# Altium PCB 400503.PcbDoc (part 3 of 3)
Units mm, origin at the board's own origin, x right, y up, seen from the top; angles counter-clockwise.
Board outline 200 x 200 mm, 4 copper layers (Top Layer, Mid-Layer 1, Mid-Layer 2, Bottom Layer), stack 1.58 mm thick; 173 components, 73 nets, 535 pads, 1026 vias.
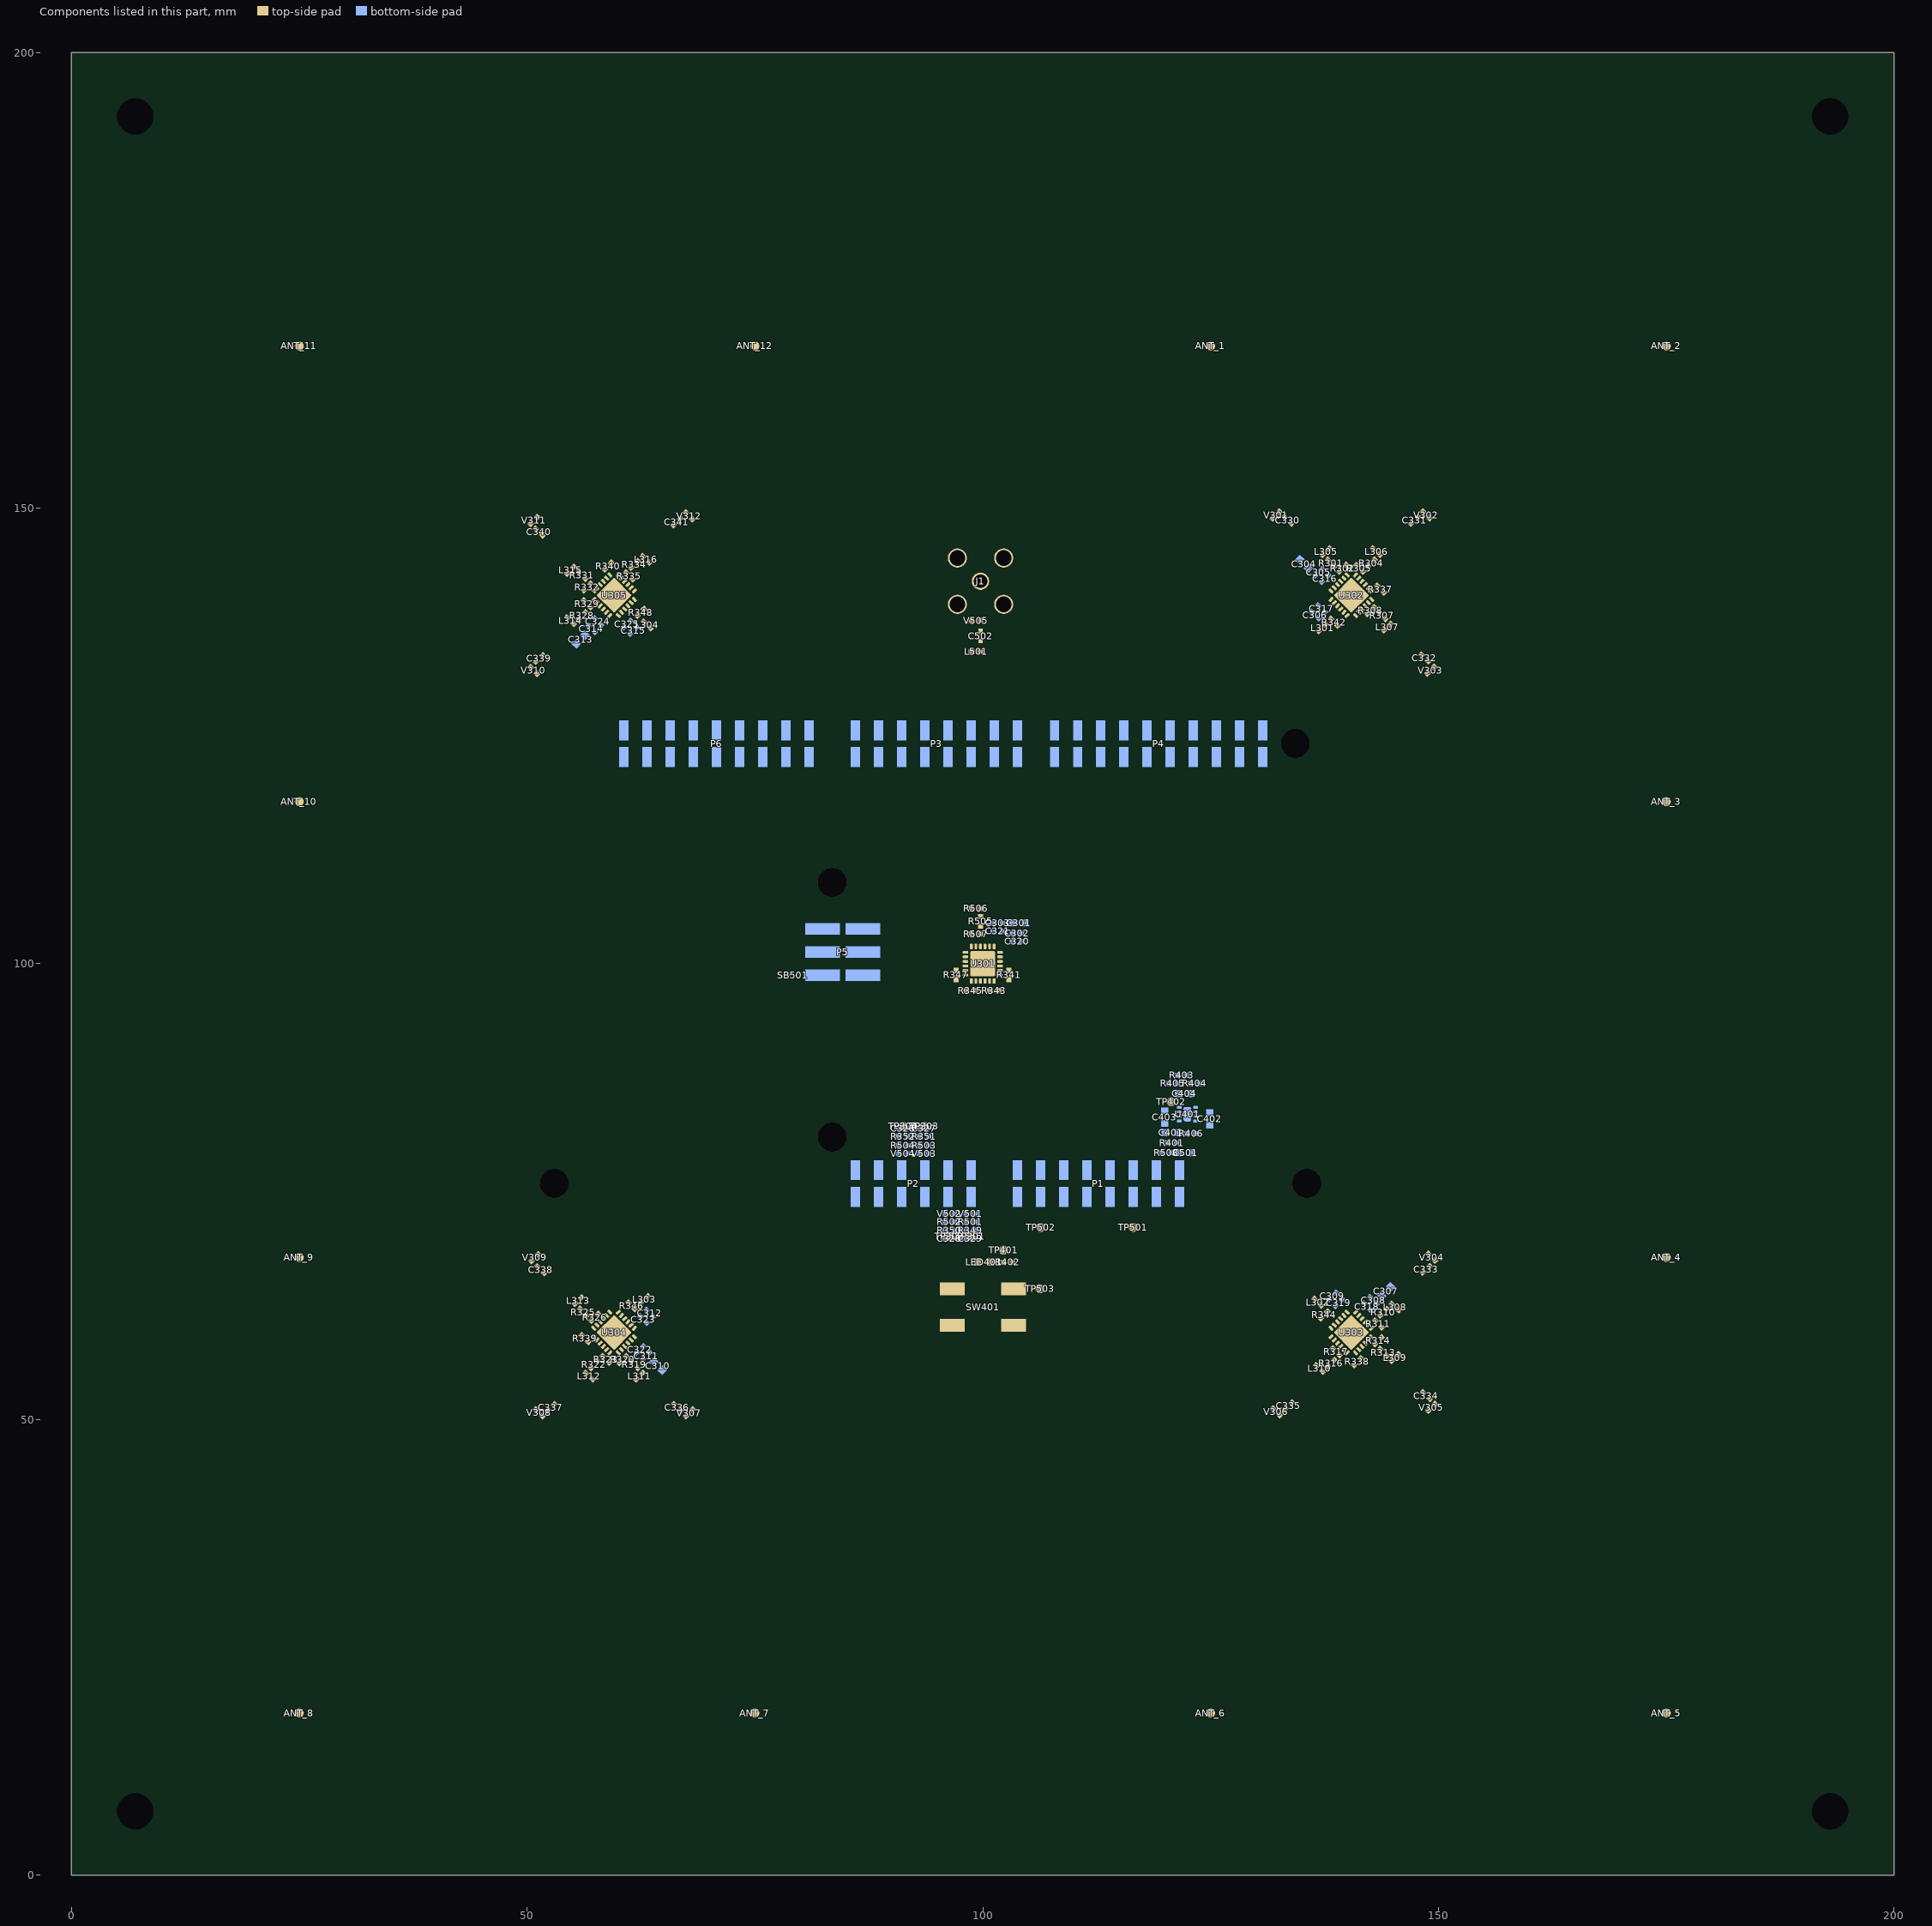
[diagram p5: the components of this part, seen from the top]

## Keep-outs
Keep-Out Layer:
  circle w0.1: c152.057,-94.309 r0.3
  circle w0.1: c152.057,-93.509 r0.3
  circle w0.1: c152.057,-92.709 r0.3
  circle w0.1: c152.057,-91.909 r0.3
  circle w0.1: c152.057,-90.309 r0.3
  circle w0.1: c152.057,-91.109 r0.3
  circle w0.1: c50.47,-81.722 r0.3
  circle w0.1: c50.47,-82.522 r0.3
  circle w0.1: c50.47,-83.322 r0.3
  circle w0.1: c50.47,-84.122 r0.3
  circle w0.1: c50.47,-85.722 r0.3
  circle w0.1: c50.47,-84.922 r0.3
  circle w0.1: c50.47,-117.422 r0.3
  circle w0.1: c50.47,-118.222 r0.3
  circle w0.1: c50.47,-116.622 r0.3
  circle w0.1: c50.47,-115.822 r0.3
  circle w0.1: c50.47,-115.022 r0.3
  circle w0.1: c50.47,-114.222 r0.3
  circle w0.1: c140.83,-68.222 r0.3
  circle w0.1: c140.03,-68.222 r0.3
  circle w0.1: c141.63,-68.222 r0.3
  circle w0.1: c142.43,-68.222 r0.3
  circle w0.1: c143.23,-68.222 r0.3
  circle w0.1: c144.03,-68.222 r0.3
  circle w0.1: c61.77,-68.222 r0.3
  circle w0.1: c60.97,-68.222 r0.3
  circle w0.1: c62.57,-68.222 r0.3
  circle w0.1: c63.37,-68.222 r0.3
  circle w0.1: c64.17,-68.222 r0.3
  circle w0.1: c64.97,-68.222 r0.3
  circle w0.1: c61.77,-131.722 r0.3
  circle w0.1: c60.97,-131.722 r0.3
  circle w0.1: c62.57,-131.722 r0.3
  circle w0.1: c63.37,-131.722 r0.3
  circle w0.1: c64.17,-131.722 r0.3
  circle w0.1: c64.97,-131.722 r0.3
  circle w0.1: c144.03,-131.722 r0.3
  circle w0.1: c143.23,-131.722 r0.3
  circle w0.1: c142.43,-131.722 r0.3
  circle w0.1: c141.63,-131.722 r0.3
  circle w0.1: c140.03,-131.722 r0.3
  circle w0.1: c140.83,-131.722 r0.3

## Other copper
Top Layer:
  region net NetANT_3_1: 189.5,110.5 164.743,110.5 160.5,114.743 160.5,139.5 185.257,139.5 189.5,135.257
  region net NetANT_10_1: 39.5,110.5 14.743,110.5 10.5,114.743 10.5,139.5 35.257,139.5 39.5,135.257
  region net NetANT_9_1: 39.5,60.5 14.743,60.5 10.5,64.743 10.5,89.5 35.257,89.5 39.5,85.257
  region net NetANT_8_1: 10.5,39.5 35.257,39.5 39.5,35.257 39.5,10.5 14.743,10.5 10.5,14.743
  region net NetANT_7_1: 60.5,39.5 85.257,39.5 89.5,35.257 89.5,10.5 64.743,10.5 60.5,14.743
  region net NetANT_6_1: 110.5,39.5 135.257,39.5 139.5,35.257 139.5,10.5 114.743,10.5 110.5,14.743
  region net NetANT_5_1: 160.5,39.5 185.257,39.5 189.5,35.258 189.5,10.5 164.743,10.5 160.5,14.743
  region net NetANT_4_1: 189.5,60.499 164.743,60.499 160.5,64.742 160.5,89.499 185.257,89.499 189.5,85.256
  region net NetANT_2_1: 160.5,189.5 185.257,189.5 189.5,185.257 189.5,160.5 164.743,160.5 160.5,164.743
  region net NetANT_1_1: 110.5,189.5 135.257,189.5 139.5,185.257 139.5,160.5 114.743,160.5 110.5,164.743
  region net NetANT_12_1: 60.5,189.5 85.257,189.5 89.5,185.257 89.5,160.5 64.743,160.5 60.5,164.743
  region net NetANT_11_1: 10.5,189.5 35.257,189.5 39.5,185.257 39.5,160.5 14.743,160.5 10.5,164.743
Bottom Layer:
  pour cut-out: 175,116.438 cw(c175,117.8) 173.638,117.8 cw(c175,117.8) 175,119.162 cw(c175,117.8) 176.362,117.8 cw(c175,117.8)
  pour cut-out: 25,66.438 cw(c25,67.8) 23.638,67.8 cw(c25,67.8) 25,69.162 cw(c25,67.8) 26.362,67.8 cw(c25,67.8)
  pour cut-out: 25,116.438 cw(c25,117.8) 23.638,117.8 cw(c25,117.8) 25,119.162 cw(c25,117.8) 26.362,117.8 cw(c25,117.8)
  pour cut-out: 25,166.438 cw(c25,167.8) 23.638,167.8 cw(c25,167.8) 25,169.162 cw(c25,167.8) 26.362,167.8 cw(c25,167.8)
  pour cut-out: 75,166.438 cw(c75,167.8) 73.638,167.8 cw(c75,167.8) 75,169.162 cw(c75,167.8) 76.362,167.8 cw(c75,167.8)
  pour cut-out: 125,166.438 cw(c125,167.8) 123.638,167.8 cw(c125,167.8) 125,169.162 cw(c125,167.8) 126.362,167.8 cw(c125,167.8)
  pour cut-out: 175,166.438 cw(c175,167.8) 173.638,167.8 cw(c175,167.8) 175,169.162 cw(c175,167.8) 176.362,167.8 cw(c175,167.8)
  pour cut-out: 175,66.437 cw(c175,67.799) 173.638,67.799 cw(c175,67.799) 175,69.161 cw(c175,67.799) 176.362,67.799 cw(c175,67.799)
  pour cut-out: 175,16.439 cw(c175,17.8) 173.638,17.8 cw(c175,17.8) 175,19.162 cw(c175,17.8) 176.362,17.8 cw(c175,17.8)
  pour cut-out: 125,16.438 cw(c125,17.799) 123.638,17.799 cw(c125,17.799) 125,19.161 cw(c125,17.799) 126.362,17.799 cw(c125,17.799)
  pour cut-out: 75,16.438 cw(c75,17.8) 73.638,17.8 cw(c75,17.8) 75,19.162 cw(c75,17.8) 76.362,17.8 cw(c75,17.8)
  pour cut-out: 25,16.438 cw(c25,17.8) 23.638,17.8 cw(c25,17.8) 25,19.162 cw(c25,17.8) 26.362,17.8 cw(c25,17.8)
  pour cut-out: 118.77,74.778 118.77,78.828 121.167,78.828 121.256,74.778
  pour cut-out: 119.47,83.128 119.47,83.428 120.656,83.428 120.663,83.128
  pour cut-out: 120.62,82.078 120.92,82.078 120.92,81.092 120.62,81.085
  pour cut-out: 122.12,79.878 122.42,79.878 122.42,78.892 122.12,78.885
  pour cut-out: 125.47,83.128 125.47,82.828 124.484,82.828 124.477,83.128
  pour cut-out: 63.66,56.541 64.296,57.178 64.013,57.461 63.377,56.824
  pour cut-out: 56.583,136.079 57.219,135.442 57.502,135.725 56.865,136.362
  pour cut-out: 103.77,104.928 103.77,104.028 104.17,104.028 104.17,104.928

## Silkscreen, mask and mechanical layers (free items; w line width, h text height)
Top Overlay:
  circle w0.15: c7,7 r2.5
  circle w0.15: c193,7 r2.5
  circle w0.15: c193,193 r2.5
  circle w0.15: c7,193 r2.5
  text ".PCBNumber" at 85.97,138.978 h2.03
  text ".PCBRevision" at 86.17,137.478 h1.52
Bottom Overlay:
  circle w0.15: c57.026,99.998 r0.899
  region: 59.36,125.435
  lines w0.15: 121.171,84.497 121.171,84.742 121.671,84.742 ; 123.213,82.298 123.713,82.298 123.713,82.543 ; 95.97,138.278 103.47,138.278 103.47,145.778 95.97,145.778 95.97,138.278
  lines w0.254: 47.93,78.445 50.47,75.905 50.47,69.301 ccw(c51.473,69.288) 51.461,68.285 148.514,68.285 ccw(c148.514,69.301) 149.53,69.301 149.53,130.794 ccw(c148.527,130.782) 148.514,131.785 51.486,131.785 ccw(c51.486,130.769) 50.47,130.769 50.47,113.751 47.93,111.211 47.93,78.445
  text "P0.21" at 66.202,121.396 h1.78 r90
  text "P0.05" at 68.742,121.396 h1.78 r90
  text "P0.06" at 71.282,121.396 h1.78 r90
  text "P0.07" at 73.822,121.396 h1.78 r90
  text "P0.08" at 76.362,121.396 h1.78 r90
  text "P0.09" at 78.902,121.396 h1.78 r90
  text "P0.10" at 81.442,121.396 h1.78 r90
  text "P0.11 (ARDUINO D0)" at 86.522,121.396 h1.65 r90
  text "P0.12 (D1)" at 89.062,121.396 h1.65 r90
  text "P0.13 (D2)" at 91.602,121.396 h1.65 r90
  text "P0.14 (D3)" at 94.142,121.396 h1.65 r90
  text "P0.15 (D4)" at 96.682,121.396 h1.65 r90
  text "P0.16 (D5)" at 99.222,121.396 h1.65 r90
  text "P0.17 (D6)" at 101.762,121.396 h1.65 r90
  text "P0.18 (D7)" at 104.302,121.396 h1.65 r90
  text "P0.19 (D8)" at 108.366,121.396 h1.65 r90
  text "P0.20 (D9)" at 110.906,121.396 h1.65 r90
  text "P0.22 (D10)" at 113.446,121.396 h1.65 r90
  text "P0.23 (D11)" at 115.986,121.396 h1.65 r90
  text "P0.24 (D12)" at 118.526,121.396 h1.65 r90
  text "P0.25 (D13)" at 121.066,121.396 h1.65 r90
  text "GND" at 123.606,121.396 h1.65 r90
  text "P0.02 (AREF)" at 126.146,121.396 h1.65 r90
  text "P0.26 (SDA)" at 128.686,121.396 h1.65 r90
  text "P0.27 (SCL)" at 131.226,121.396 h1.65 r90
  text "P0.00" at 61.097,121.371 h1.78 r90
  text "P0.01" at 63.687,121.363 h1.78 r90
  text "N.C." at 104.87,72.778 h1.78 r90
  text "VDD" at 119.57,72.778 h1.65 r90
  text "VDD" at 122.07,72.778 h1.65 r90
  text "GND" at 106.925,72.757 h1.65 r90
  text "GND" at 109.388,72.757 h1.65 r90
  text "5V" at 111.897,72.757 h1.65 r90
  text "VDD" at 114.462,72.757 h1.65 r90
  text "RESET" at 117.008,72.757 h1.65 r90
  text "P0.31 (A5)" at 86.449,67.604 h1.65 r90
  text "P0.29 (A3)" at 91.529,67.587 h1.65 r90
  text "P0.28 (A2)" at 94.069,67.587 h1.65 r90
  text "P0.04 (A1)" at 96.609,67.587 h1.65 r90
  text "P0.03 (A0)" at 99.149,67.597 h1.65 r90
  text "P0.30 (A4)" at 88.995,67.57 h1.65 r90
Top Solder:
  region: 192.504,10.71 189.443,10.71 189.443,7.519 192.504,7.519
  rectangle: 7.496,189.291 10.557,192.481
Outline:
  pour cut-out: 25,17.8
  lines w0.3: 0,0 200,0 200,200 0,200 0,0
Mechanical 2:
  circle w0.5: c25,117.8 r2.378
  circle w0.5: c25,167.8 r2.378
  circle w0.5: c75,167.8 r2.378
  circle w0.5: c125,167.8 r2.378
  circle w0.5: c175,167.8 r2.378
  circle w0.5: c175,117.8 r2.378
  circle w0.5: c175,67.799 r2.378
  circle w0.5: c175,17.8 r2.378
  circle w0.5: c25,67.8 r2.378
  circle w0.5: c125,17.799 r2.378
  circle w0.5: c75,17.8 r2.378
  circle w0.5: c25,17.8 r2.378
  circle w0.01: c7,193 r2
  circle w0.01: c193,7 r2
  circle w0.01: c7,7 r2
  circle w0.01: c193,193 r2
  lines w0.01: 0,0 200,0 200,200 0,200 0,0
Mechanical_input:
  drawing of 319 lines, arcs and shapes, not listed
  text "GND" at 61.138,-70.01 h1.78
  text "GND" at 144.628,-70.061 h1.78
  text "GND" at 52.934,-72.55 h1.78
  text "'.PCBrevision'" at 148.285,-79.195 h1 r90
  text "'.PCBnumber'" at 146.982,-79.26 h2.03 r90
  text "P0.27" at 69.774,-81.847 h1.78 r90
  text "P0.26" at 72.314,-81.847 h1.78 r90
  text "P0.02" at 74.854,-81.847 h1.78 r90
  text "GND" at 77.394,-81.847 h1.78 r90
  text "P0.25" at 79.934,-81.847 h1.78 r90
  text "P0.24" at 82.474,-81.847 h1.78 r90
  text "P0.23" at 85.014,-81.847 h1.78 r90
  text "P0.22" at 87.554,-81.847 h1.78 r90
  text "P0.20" at 90.094,-81.847 h1.78 r90
  text "P0.19" at 92.634,-81.847 h1.78 r90
  text "P0.18" at 96.698,-81.847 h1.78 r90
  text "P0.17" at 99.238,-81.847 h1.78 r90
  text "P0.16" at 101.778,-81.847 h1.78 r90
  text "P0.15" at 104.318,-81.847 h1.78 r90
  text "P0.14" at 106.858,-81.847 h1.78 r90
  text "P0.13" at 109.398,-81.847 h1.78 r90
  text "P0.12" at 111.938,-81.847 h1.78 r90
  text "P0.10" at 119.558,-81.847 h1.78 r90
  text "P0.09" at 122.098,-81.847 h1.78 r90
  text "P0.08" at 124.638,-81.847 h1.78 r90
  text "P0.07" at 127.178,-81.847 h1.78 r90
  text "P0.06" at 129.718,-81.847 h1.78 r90
  text "P0.05" at 132.258,-81.847 h1.78 r90
  text "P0.21" at 134.798,-81.847 h1.78 r90
  text "P0.01" at 137.338,-81.847 h1.78 r90
  text "P0.00" at 139.903,-81.847 h1.78 r90
  text "Debug out" at 50.876,-81.974 h2.03
  text "LED1" at 128.321,-84.174 h2.03
  text "LED2" at 134.519,-84.174 h2.03
  text "GPIO" at 120.472,-87.653 h1
  text "LED3" at 128.194,-87.958 h2.03
  text "LED4" at 134.544,-87.958 h2.03
  text "XTAL" at 120.472,-88.923 h1
  text "nRF current" at 54.102,-90.102 h2.03
  text "VTG" at 74.778,-90.676 h1.4 r90
  text "VDD / nRF" at 70.231,-90.752 h1.4 r90
  text "VDD" at 72.238,-90.74 h1.4 r90
  text "(ARDUINO D0) P0.11" at 114.503,-90.879 h1.78 r90
  text "SWD / IO" at 77.978,-90.981 h1.4 r90
  text "SWD / CLK" at 80.518,-90.981 h1.4 r90
  text "SWO" at 82.398,-90.993 h1.4 r90
  text "measurement" at 53.62,-91.397 h2.03
  text "RESET" at 84.989,-91.921 h1.4 r90
  text "GND / DETECT" at 88.722,-92.108 h1.4 r90
  text "P0.24" at 108.237,-96.651 h1
  text "5V" at 119.718,-96.702 h1
  text "P0.23" at 119.718,-99.165 h1
  text "P0.25" at 108.187,-99.191 h1
  text "DETECT" at 119.63,-101.659 h1
  text "RESET" at 107.425,-101.731 h1
  text "Button 1" at 124.661,-109.435 h2.29
  text "Button 2" at 135.633,-109.435 h2.29
  text "External supply" at 52.781,-111.031 h2.03
  text "-" at 64.237,-113.47 h1.78
  text "Debug in" at 108.661,-115.72 h2.03
  text "GND" at 97.866,-115.771 h1.78 r90
  text "+" at 64.237,-116.01 h1.78
  text "IF BOOT/RESET" at 65.735,-120.48 h2.03
  text "Button 4" at 135.684,-120.625 h2.29
  text "Button 3" at 124.584,-120.636 h2.29
  text "N.C." at 96.723,-121.268 h1.78 r90
  text "VDD" at 78.835,-121.271 h1.78 r90
  text "VDD" at 81.375,-121.271 h1.78 r90
  text "RESET" at 83.915,-121.271 h1.78 r90
  text "VDD" at 86.455,-121.271 h1.78 r90
  text "5V" at 88.995,-121.271 h1.78 r90
  text "GND" at 91.535,-121.271 h1.78 r90
  text "GND" at 94.075,-121.271 h1.78 r90
  text "P0.03 (A0)" at 101.695,-121.271 h1.78 r90
  text "P0.04" at 104.235,-121.271 h1.78 r90
  text "P0.28" at 106.775,-121.271 h1.78 r90
  text "P0.29" at 109.315,-121.271 h1.78 r90
  text "P0.30" at 111.855,-121.271 h1.78 r90
  text "P0.31" at 114.395,-121.271 h1.78 r90
  text "OFF" at 53.391,-129.853 h1.78
  text "ON" at 56.82,-129.853 h1.78
  text "nRF52811-DK" at 137.059,-130.605 h2.54
  text "GND" at 70.282,-130.97 h1.78
  text "Power" at 53.823,-131.224 h2.03
Mechanical 8:
  circle w0.1: c121.97,82.778 r0.1
  circle w0.1: c53.01,75.915 r1.6
  circle w0.1: c134.29,124.175 r1.6
  circle w0.1: c135.56,75.915 r1.6
  circle w0.1: c83.49,108.935 r1.6
  circle w0.1: c83.49,80.995 r1.6
  lines w0.254: 47.93,78.445 47.93,111.211 50.47,113.751 50.47,130.769 cw(c51.486,130.769) 51.486,131.785 148.514,131.785 cw(c148.527,130.782) 149.53,130.794 149.53,69.301 cw(c148.514,69.301) 148.514,68.285 51.461,68.285 cw(c51.473,69.288) 50.47,69.301 50.47,75.905 47.93,78.445

## Dimensions
200,200 to 0,200 on Outline
0,0 to 0,200 on Outline
51.486,130.769 to 150.789,133.027 on Mechanical 3
148.514,68.285 to 134.29,124.165 on Mechanical 3
148.514,68.285 to 83.49,108.925 on Mechanical 3
148.514,68.285 to 83.49,80.985 on Mechanical 3
148.514,68.285 to 53.01,75.905 on Mechanical 3
148.514,68.285 to 148.514,131.785 on Mechanical 3
149.53,130.794 to 53.01,75.905 on Mechanical 3
149.53,130.794 to 83.49,80.985 on Mechanical 3
149.53,130.794 to 134.29,124.165 on Mechanical 3
149.53,130.794 to 135.56,75.905 on Mechanical 3
149.53,130.794 to 47.93,78.445 on Mechanical 3
149.53,130.794 to 50.47,75.905 on Mechanical 3